# Allegro board POWER.brd
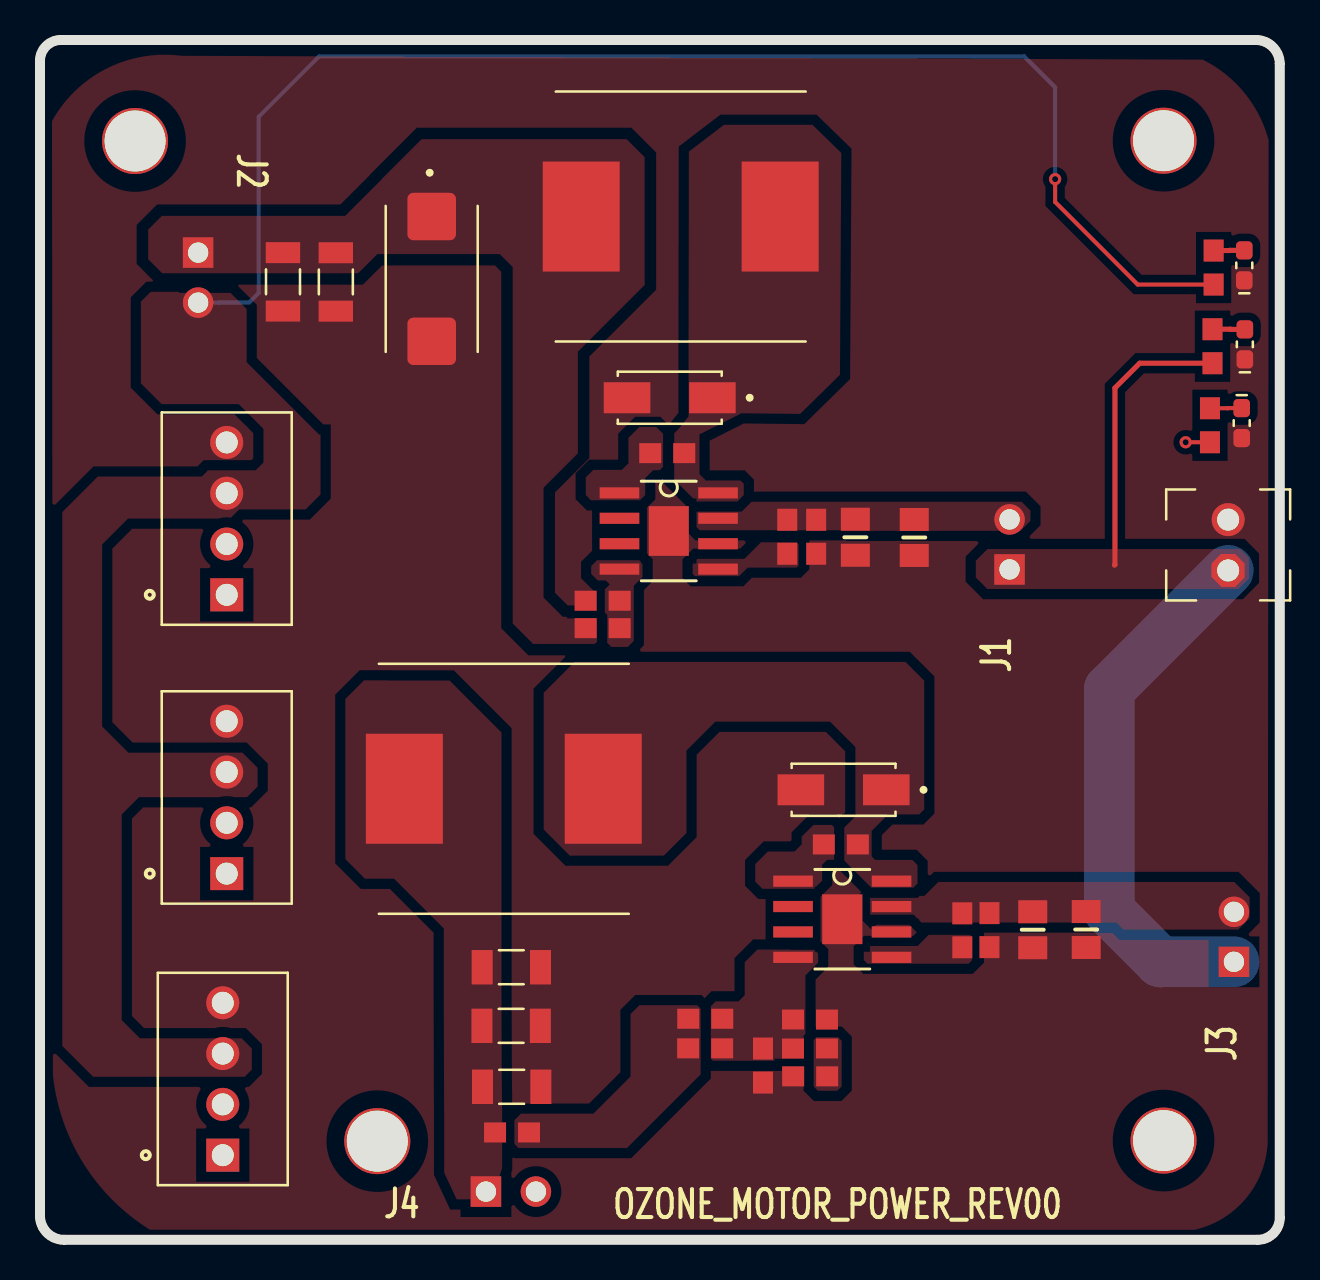
[diagram p0: board, top side]
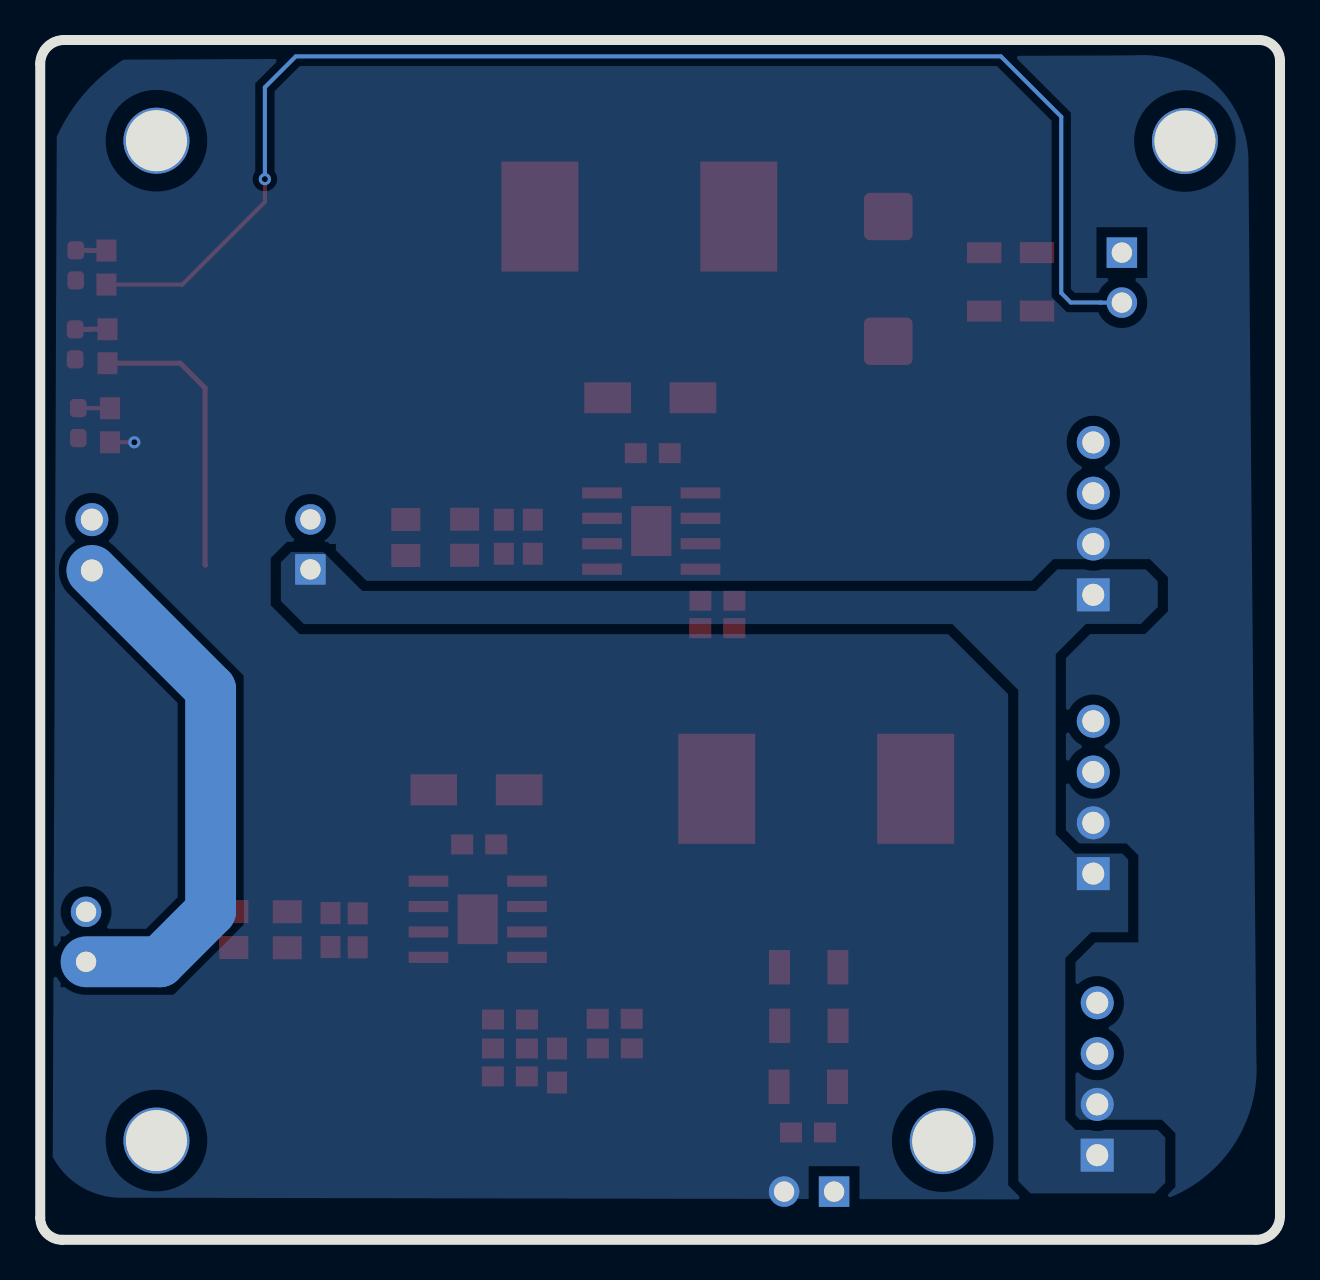
[diagram p1: board, bottom side, seen from below]

Outline 62.02 x 60.01 mm; copper layers: TOP, BOTTOM. Coordinates in mm from the lower left corner of the outline.
Outline path: 0,58.96 arc(0.31,59.7) 1.05,60.01 60.82,60.01 arc(61.66,59.66) 62.01,58.81 62.01,1.11 arc(61.68,0.33) 60.91,0.01 1.2,0.01 arc(0.35,0.36) 0,1.21 0,58.96 ; 0.02,59 arc(0.31,59.71) 1.02,60 61.02,60 arc(61.73,59.71) 62.02,59 62.02,1 arc(61.73,0.29) 61.02,0 1.02,0 arc(0.31,0.29) 0.02,1 0.02,59

## Placement (name value [footprint] x y rotation side)
C1  4.7UF  [0805]  43.73 35.13 270 top
C2  4.7UF  [0805]  40.78 35.14 270 top
C3  0.1uF  [0603]  38.82 35.17 270 top
C4  0.01uF  [0603]  31.37 39.35 0 top
C5  220uf  [CAPPM7343X310N]  19.59 48.06 270 top
C6  0.1UF  [1206]  14.8 47.91 270 top
C7  0.1UF  [1206]  12.15 47.91 270 top
C8  4.7UF  [0805]  52.33 15.52 270 top
C9  0.1UF  [0805]  49.65 15.51 270 top
C10  0.1uF  [0603]  47.49 15.5 270 top
C11  100UF  [1206]  23.57 13.64 0 top
C12  0.1UF  [1206]  23.56 10.71 0 top
C13  0.1UF  [1206]  23.59 7.66 0 top
C14  150pF  [0603]  38.51 11.03 0 top
C15  0.1uF  [0603]  38.51 9.58 0 top
C16  1500pF  [0603]  33.27 11.06 180 top
C17  0.01uF  [0603]  40.05 19.78 0 top
D1  B340A-13-F  [DIOM5226X240N]  31.5 42.12 180 top
D2  MRBS340  [DIOM5226X240N]  40.19 22.51 180 top
D3  GREEN  [LEDSC160X80X70L45N]  60.23 48.74 90 top
D4  Blue  [LEDSC160X80X70L45N]  60.26 44.79 90 top
D5  RED  [LEDSC160X80X70L45N]  60.1 40.85 270 top
J1  HDR1x2  [HDR_1X2]  48.49 33.53 90 top
J2  HDR1x2  [HDR_1X2]  7.91 49.38 270 top
J3  HDR1x2  [HDR_1X2]  59.72 13.91 90 top
J4  HDR1x2  [HDR_1X2]  22.3 2.42 0 top
J5  Power  [TE_1546215-4]  9.34 36.07 90 top
J8  CON2  [1725656]  59.43 33.48 90 top
J9  Power  [TE_1546215-4]  9.34 22.13 90 top
J10  Power  [TE_1546215-4]  9.14 8.05 90 top
L1  22uH  [INDM1250X1250X600]  32.04 51.18 180 top
L2  15uH  [INDM1250X1250X600]  23.2 22.56 180 top
NOREF  -  [unnamed]  16.86 5.19 0 top
NOREF#2  -  [unnamed]  56.18 55.22 0 top
NOREF#3  -  [unnamed]  56.18 5.22 0 top
NOREF#4  -  [unnamed]  4.74 55.2 0 top
R1  NC  [0603]  37.37 35.17 270 top
R2  10K  [0603]  28.14 30.59 0 top
R3  3.24K  [0603]  28.14 31.97 180 top
R5  NC  [0603]  46.13 15.49 270 top
R6  0 OHM  [0603]  23.61 5.38 0 top
R7  549  [0603]  38.52 8.18 180 top
R8  5.9K  [0603]  36.16 8.73 270 top
R9  10K  [0603]  33.27 9.58 180 top
R10  330  [0603]  58.7 48.63 90 top
R11  1.2K  [0603]  58.64 44.69 90 top
R12  1.2K  [0603]  58.52 40.74 90 top
U1  TPS5430DDA  [SOIC127P600X170-9N]  31.45 35.45 0 top
U2  TPS5430DDA_0  [SOIC127P600X170-9N]  40.13 16.04 0 top

## Library data of the parts
C1-C4 C6-C17 = CAP NP
C5 = C
D1 = DIODE SCHOTTKY_1
D2 = DIODE SCHOTTKY_2
D3 = LED_8
D4 = LED_9
D5 = LED_10
J1-J4 = CON2
J5 J9 J10 = CON4_0
J8 = CON2_0
L1 L2 = INDUCTOR
R1-R3 R5-R12 = RESISTOR_7
U1 U2 = TPS5430DDA_0

## Footprints (pads in the part's own frame, mm; a bottom-side part is the same pattern mirrored in y, then rotated)
0603
  rect 1.1x1 smd: 1(-0.85,0) 2(0.85,0)
0805
  rect 1.15x1.45 smd: 1(-0.9,0) 2(0.9,0)
1206
  rect 1.05x1.72 smd: 1(-1.46,0) 2(1.46,0)
1725656
  rrect 1.65x1.65 hole 1.1: 1(0,0)
  round 1.65 hole 1.1: 2(2.54,0)
CAPPM7343X310N
  custom 2.37x2.43 smd: 1(-3.12,0) 2(3.12,0)
DIOM5226X240N
  rect 2.33x1.55 smd: A(2.135,0) C(-2.135,0)
HDR_1X2
  rect 1.524x1.524 hole 1.016: 1(0,0)
  round 1.524 hole 1.016: 2(2.5,0)
INDM1250X1250X600
  rect 3.85x5.5 smd: 1(-4.975,0) 2(4.975,0)
LEDSC160X80X70L45N
  custom 0.91x0.83 smd: A(0.75,0) C(-0.75,0)
SOIC127P600X170-9N
  rect 1.981x0.559 smd: 1(-2.464,1.905) 2(-2.464,0.635) 3(-2.464,-0.635) 4(-2.464,-1.905) 5(2.464,-1.905) 6(2.464,-0.635) 7(2.464,0.635) 8(2.464,1.905)
  rect 2.007x2.489 smd: 9(0,0)
TE_1546215-4
  rect 1.65x1.65 hole 1.1: 1(-3.81,0)
  round 1.65 hole 1.1: 2(-1.27,0) 3(1.27,0) 4(3.81,0)
unnamed
  round 3.302 hole 3.048: (0.013,-0.244)

## Nets
+12V: J1.1 J3.1 J5.1 J8.1 J9.1 J10.1 R11.1
GND: C1.2 C2.2 C3.2 C5.2 C6.2 C7.2 C8.2 C9.2 C10.2 C11.2 C12.2 C13.2 C14.2 D1.A D2.A D3.C D4.C D5.A J5.4 J8.2 J9.4 J10.4 R3.2 R7.2 R8.2 U1.6(GND) U1.9 U2.6(GND) U2.9
VCC_3V3: J4.2 J5.2 J9.2 J10.2 R12.1
VCC_5V: J2.2 J5.3 J9.3 J10.3 R10.1
12_VIN: C1.1 C2.1 C3.1 J1.2 R1.1 U1.7(VIN)
12_VIN_1: C8.1 C9.1 C10.1 J3.2 R5.1 U2.7(VIN)
N101734: C11.1 C12.1 C13.1 J4.1 L2.2 R6.1
N19598763: D3.A R10.2
N19598787: D4.A R11.2
N19598817: D5.C R12.2
N20331542: C5.1 C6.1 C7.1 J2.1 L1.2 R2.1
N20331566: C4.1 U1.1(BOOT)
N20331570: C4.2 D1.C L1.1 U1.8(PH)
N20331693: R2.2 R3.1 U1.4(VSNS)
N20331723: R1.2 U1.5(ENA)
N20334285: C17.1 U2.1(BOOT)
N20334289: R5.2 U2.5(ENA)
N20334303: C17.2 D2.C L2.1 U2.8(PH)
N20334321: C14.1 C15.1 C16.1 R8.1 R9.1 U2.4(VSNS)
N20334349: C15.2 R7.1
N20334502: C16.2 R6.2 R9.2

Pads without a net: U1 2 3; U2 2 3

## Via types
v1: diameter 0.61, hole 0.305, TOP to BOTTOM, 2 vias

## Routing (per net, layer and track width the routed paths; a pad name or vN(x,y) marks a point on that pad's centre or on a via; arc(x,y) is an arc through that point)
+12V: length 41
  TOP w0.254: R11.1 55,43.84 53.76,42.61 53.76,33.77 53.74,33.75
  BOTTOM w2.54: J3.1 56.02,13.91 53.48,16.45 53.48,27.54 J8.1
VCC_3V3: length 1.2
  TOP w0.203: R12.1 v1(57.3,39.89)
VCC_5V: length 69.1
  TOP w0.203: R10.1 54.9,47.78 50.77,51.91 v1(50.77,53.05)
  BOTTOM w0.203: v1(50.77,53.05) 50.77,57.64 49.23,59.19 13.96,59.19 10.94,56.17 10.94,47.35 10.47,46.88 8.98,46.88 8.98,46.88 J2.2
N19598763: length 1.5
  TOP w0.254: R10.2 59.5,49.48 59.51,49.49 D3.A
N19598787: length 1.6
  TOP w0.254: R11.2 59.53,45.54 59.54,45.54 D4.A
N19598817: length 1.6
  TOP w0.203: D5.C 59.41,41.6 59.4,41.59 R12.2

## Copper pours and planes (outline as drawn; the poured copper is in the pictures)
+12V on TOP: 60.46,34.12 60.46,33.07 59.95,32.55 47.38,32.55 46.8,33.13 46.8,33.97 47.39,34.55 60.03,34.55
+12V on BOTTOM: 47.85,34.4 49.46,34.4 49.97,33.89 49.97,31.95 48.82,30.8 16.39,30.8 13.09,27.5 13.09,2.95 12.47,2.33 6.27,2.33 5.74,2.86 5.74,5.13 6.12,5.51 10.22,5.51 10.74,6.02 10.74,14.1 9.45,15.39 7.59,15.39 7.59,19.03 7.88,19.32 10.26,19.32 11.22,20.28 11.22,29.3 9.71,30.81 6.96,30.81 6.12,31.65 6.12,32.94 6.72,33.54 11.13,33.54 12.21,32.46 45.9,32.46
GND on TOP: 61.4,4.87 60.31,2.07 57.74,0.51 5.5,0.51 2.18,3.82 0.65,8.26 0.6,55.95 3.33,58.58 7.06,59.22 58.15,59.02 60.24,57.37 61.45,55
VCC_3V3 on BOTTOM: 61.38,4.15 59.96,2.66 57.98,2.12 5.81,2.02 2.34,4.72 1.18,8.96 1.58,53.83 3.23,57.8 7.28,59.24 57.84,59.02 59.79,57.34 61.18,55.17
VCC_5V on TOP: 9.97,38.02 9.97,36.55 9.5,36.08 4.4,36.08 3.11,34.78 3.11,25.68 4.42,24.37 10.13,24.37 10.88,23.61 10.88,22.67 10.35,22.14 4.95,22.14 4.09,21.28 4.09,10.99 4.99,10.09 10.08,10.09 10.59,9.58 10.59,8.52 10.24,8.16 2.66,8.16 1.12,9.7 1.12,36.4 2.89,38.18 9.81,38.18
VCC_5V on TOP: 6.98,47.36 9.53,47.36 10.34,46.55 10.34,43.89 13.95,40.28 14.03,40.28 14.03,37.28 13.28,36.53 8.62,36.53 7.97,37.18 7.97,38.05 8.4,38.49 10.79,38.49 11.18,38.88 11.18,40.56 9.94,41.8 6.08,41.8 5.05,42.83 5.05,46.93 5.53,47.41 6.93,47.41
12_VIN on TOP: 40.55,35.46 49.04,35.46 49.54,35.96 49.54,36.48 49.1,36.92 35.54,36.92 35.15,36.52 32.96,36.52 32.69,36.25 32.69,35.8 33,35.49 40.52,35.49
12_VIN_1 on TOP: 60.5,17.14 60.5,16.09 59.93,15.52 54.18,15.52 53.83,15.88 44.08,15.88 43.69,16.27 41.61,16.27 41.58,16.24 41.36,16.47 41.36,16.96 41.61,17.21 44.23,17.21 44.93,17.9 59.73,17.9
N101734 on TOP: 17.39,27.98 20.49,27.98 23.08,25.38 23.08,12.02 23.09,8.41 23.11,6.38 23.11,3.59 22.62,2.04 20.84,2.03 20.21,3.37 20.21,5.96 20.2,12.27 20.2,15.58 17.71,18.06 16.25,18.06 15.27,19.05 15.27,27.06 16.2,27.99 17.38,27.99
N20331542 on TOP: 27.39,31.22 27.69,31.22 27.86,31.05 27.86,29.92 27.75,29.81 24.66,29.81 23.64,30.83 23.64,48.65 22.99,49.3 16.88,49.3 15.92,48.34 6.11,48.34 5.41,49.05 5.41,50.53 6.09,51.21 15.23,51.21 15.25,51.19 17.08,53.03 17.08,53.05 19.09,55.05 29.34,55.05 30.24,54.15 30.24,47.76 26.9,44.42 26.9,39.34 25.19,37.62 25.19,32.13 26.15,31.16 27.33,31.16 27.39,31.23
N20331566 on TOP: 27.56,36.99 30.01,36.99 30.27,37.25 30.27,38.1 30.67,38.49 31,38.49 31.16,38.66 31.16,40.31 30.82,40.66 29.98,40.66 29.43,40.11 29.43,38.84 29.1,38.51 27.68,38.51 27.3,38.13 27.3,37.25
N20331570 on TOP: 31.72,40.34 31.72,38.03 32.82,36.93 34.88,36.93 35.2,37.25 35.2,37.82 35.03,37.98 33.35,37.98 33.33,37.96 32.98,38.3 32.98,40.28 35.08,41.34 38.02,41.31 40.01,43.26 40.08,54.36 38.64,55.77 34.21,55.77 32.45,54.43 32.44,43.28 32.44,41.19 31.95,40.56
N20331693 on TOP: 28.56,33.99 29.97,33.99 30.14,33.83 30.14,33.15 29.7,32.71 29.7,29.96 29.4,29.66 28.58,29.66 28.25,29.99 28.25,32.53 28.5,32.78 28.3,32.98 27.9,32.98 27.57,33.31 27.57,33.7 27.86,34 28.55,34
N20331723 on TOP: 36.06,34.89 37.84,34.89 37.97,34.76 37.97,33.75 37.85,33.62 35.4,33.62 34.97,33.2 32.75,33.2 32.64,33.31 32.64,33.83 32.88,34.06 35.23,34.06
N20334285 on TOP: 36.13,17.56 38.71,17.56 39.12,17.97 39.12,18.76 39.37,19.01 39.7,19.01 39.83,19.14 39.83,20.53 39.61,20.76 38.68,20.76 38.1,20.17 38.1,19.79 37.74,19.43 36.41,19.43 35.77,18.79 35.77,17.93
N20334289 on TOP: 44.45,15.26 46.52,15.26 46.71,15.07 46.71,14.08 46.44,13.82 41.38,13.82 41.2,14 41.2,14.48 41.43,14.7 43.89,14.7
N20334303 on TOP: 41.58,17.62 43.69,17.62 43.89,17.82 43.89,18.75 43.63,19.01 41.77,19.01 41.6,19.18 41.6,20.46 42.42,21.28 43.98,21.28 44.22,21.53 44.22,27.97 43.29,28.91 26.74,28.91 25.19,27.36 25.19,20.53 26.49,19.22 31.2,19.22 32.33,20.36 32.33,24.48 33.78,25.92 39.51,25.92 40.78,24.65 40.78,21.18 40.22,20.62 40.22,18.97
N20334321 on TOP: 37.53,14.51 38.74,14.51 38.92,14.33 38.92,13.87 38.28,13.23 38.28,9.11 38.14,8.96 33.66,8.96 33.48,9.13 33.48,11.62 33.79,11.93 34.94,11.93 35.25,12.24 35.25,13.89 35.88,14.52 37.52,14.52
N20334349 on TOP: 39.07,10.17 39.89,10.17 40.1,9.96 40.1,7.68 39.87,7.46 38.91,7.46 38.7,7.68 38.7,10 38.86,10.17 39.06,10.17
N20334502 on TOP: 29.98,11.74 32.87,11.74 33.04,11.57 33.04,8.28 29.36,4.6 23.93,4.6 23.73,4.81 23.73,5.99 24.05,6.32 27.68,6.32 29.54,8.18 29.54,11.3

## Text on the board
Ref Des/Silkscreen Top: OZONE_MOTOR_POWER_REV00
NCLEGEND-1-2: FIGURE | SIZE | 12.0 | 40.0 | 43.307 | 120.0 | DRILL CHART: TOP to BOTTOM | ALL UNITS ARE IN MILS | TOLERANCE | +3.0/-12.0 | +3.0/-3.0 | +0.0/-0.0 | PLATED | QTY | 2 | 8 | 14 | 4
